# Altium PCB XXXX.687252.XXX.PcbDoc (part 1 of 2)
Units mm, origin at the board's own origin, x right, y up, seen from the top; angles counter-clockwise.
Board outline 100 x 45 mm, 4 copper layers (Top Layer, GND Layer, Power Layer, Bottom Layer), stack 1.466 mm thick; 65 components, 66 nets, 294 pads, 231 vias.
Unrouted connection lines stored in the file: 84.
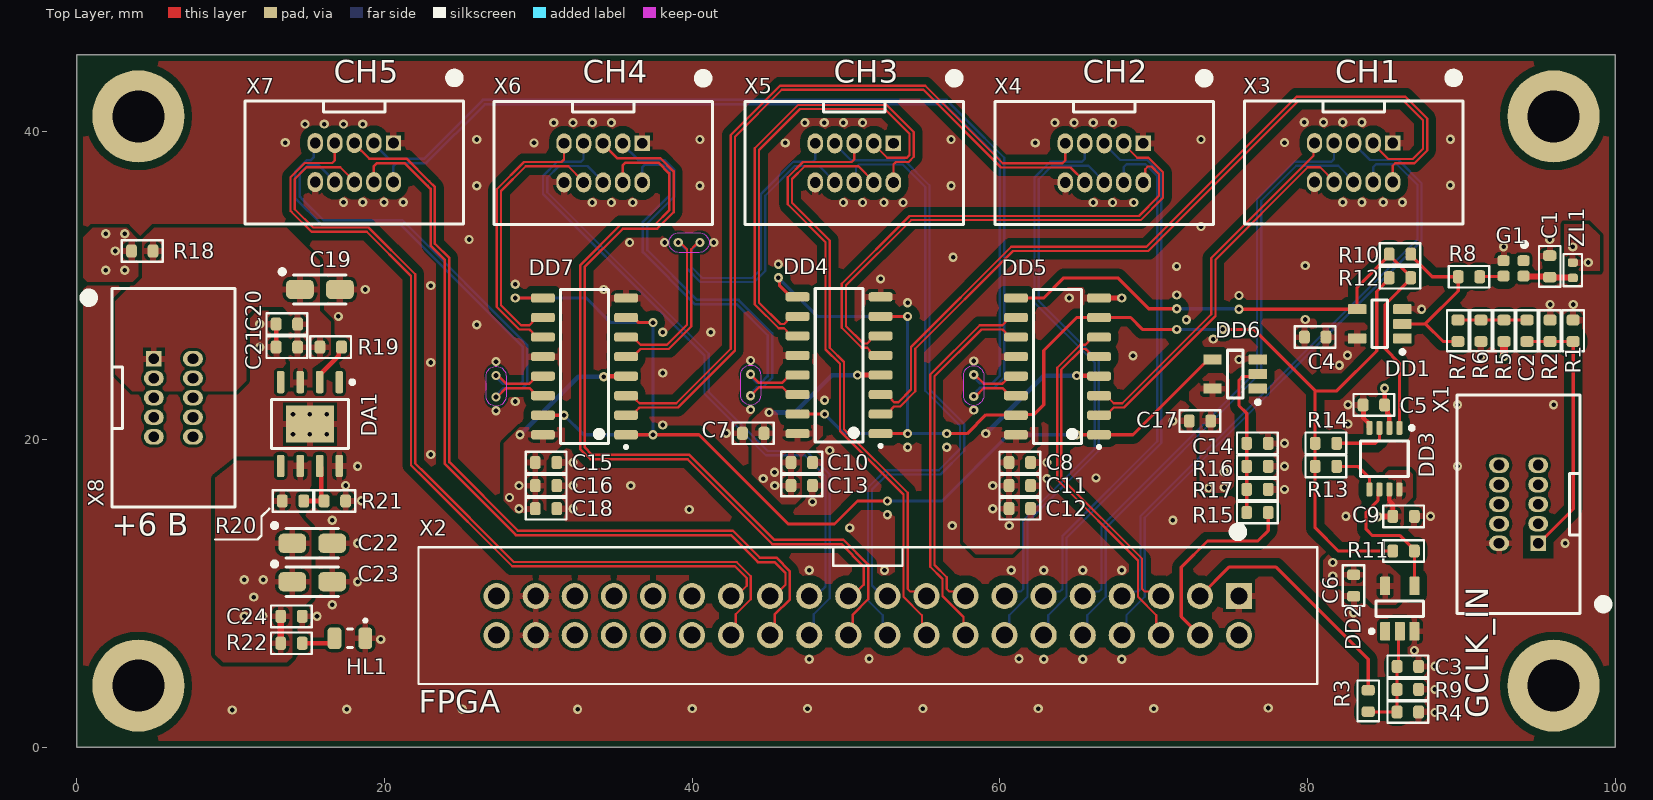
[diagram p0: Top Layer view]
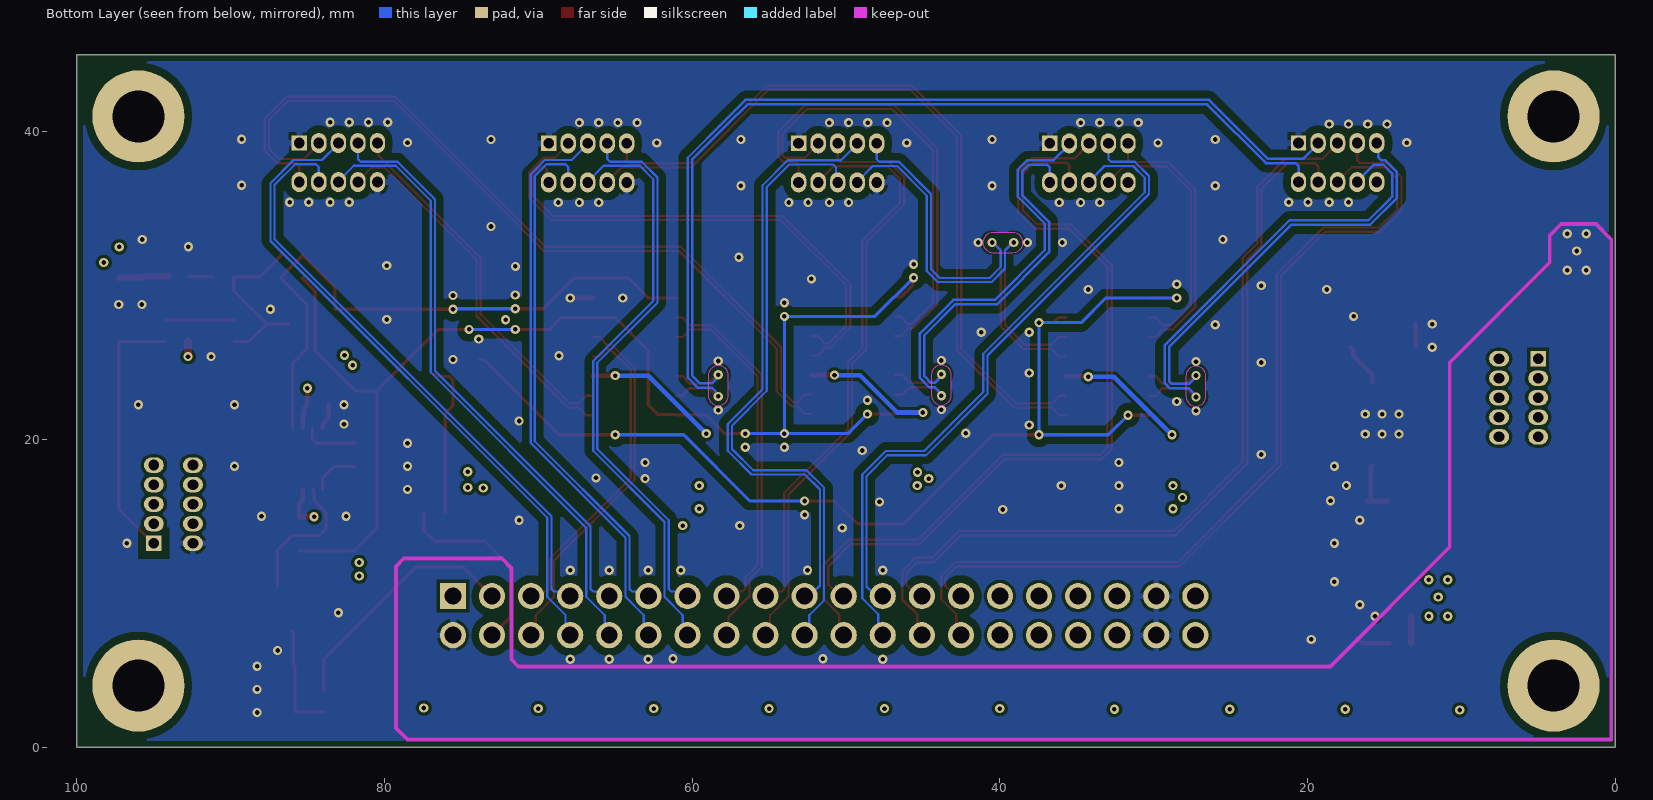
[diagram p1: Bottom Layer view, seen from below]
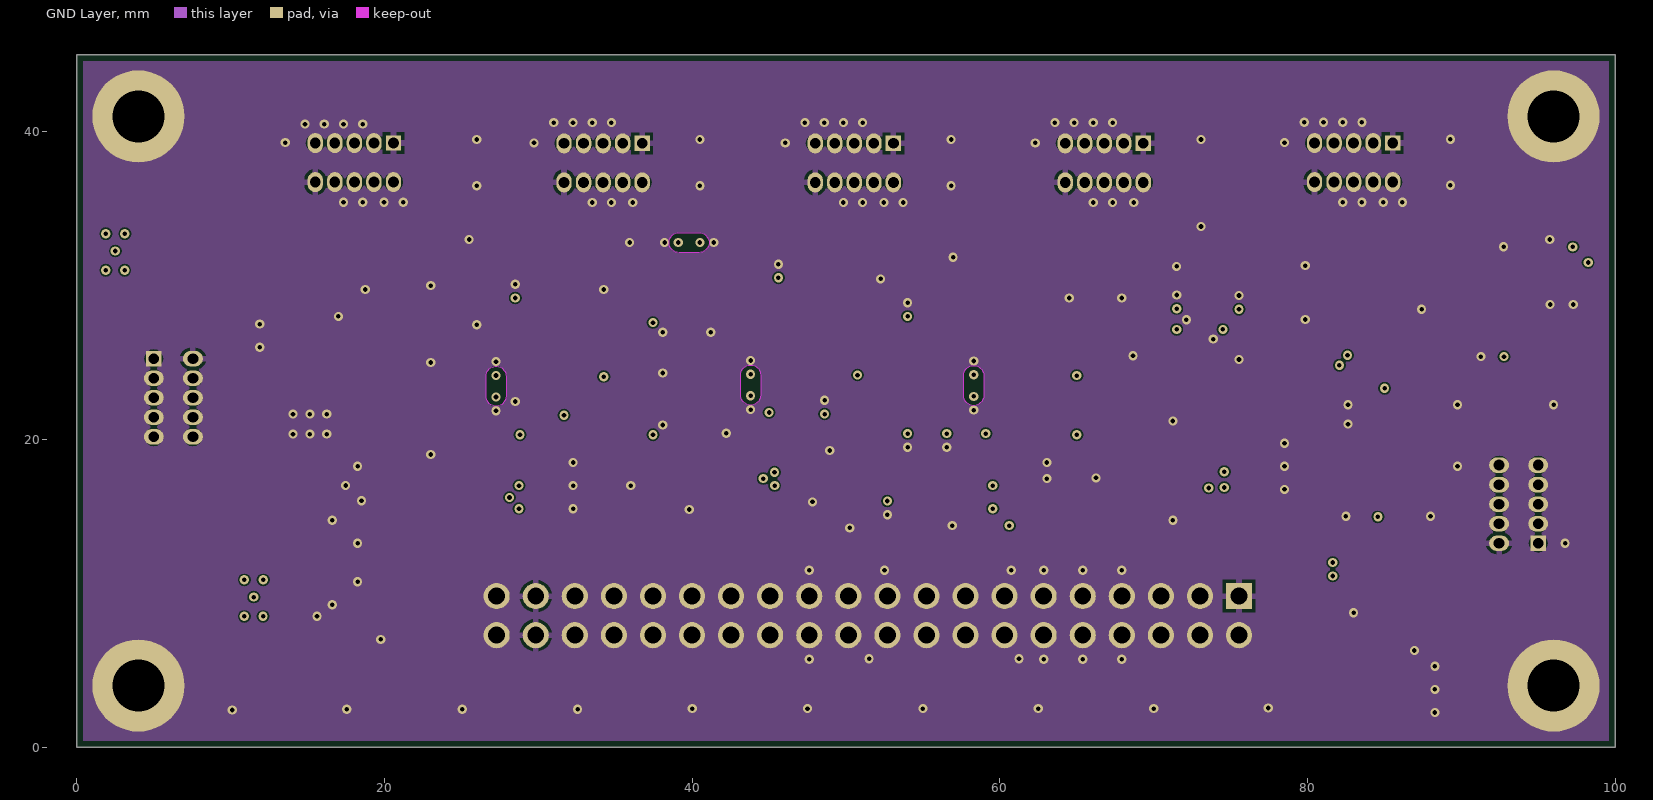
[diagram p2: GND Layer]
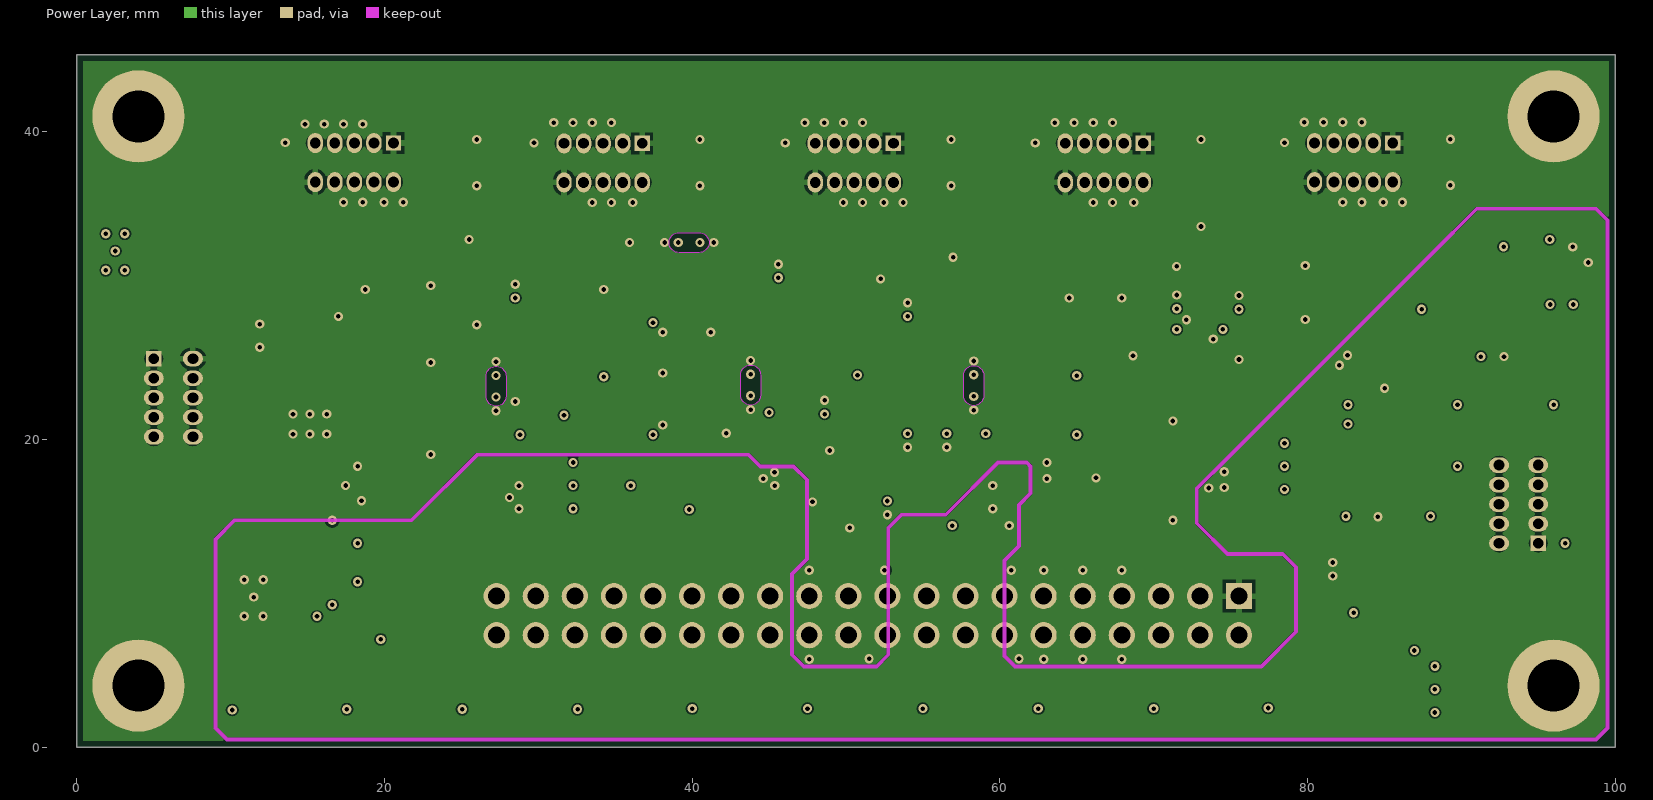
[diagram p3: Power Layer]
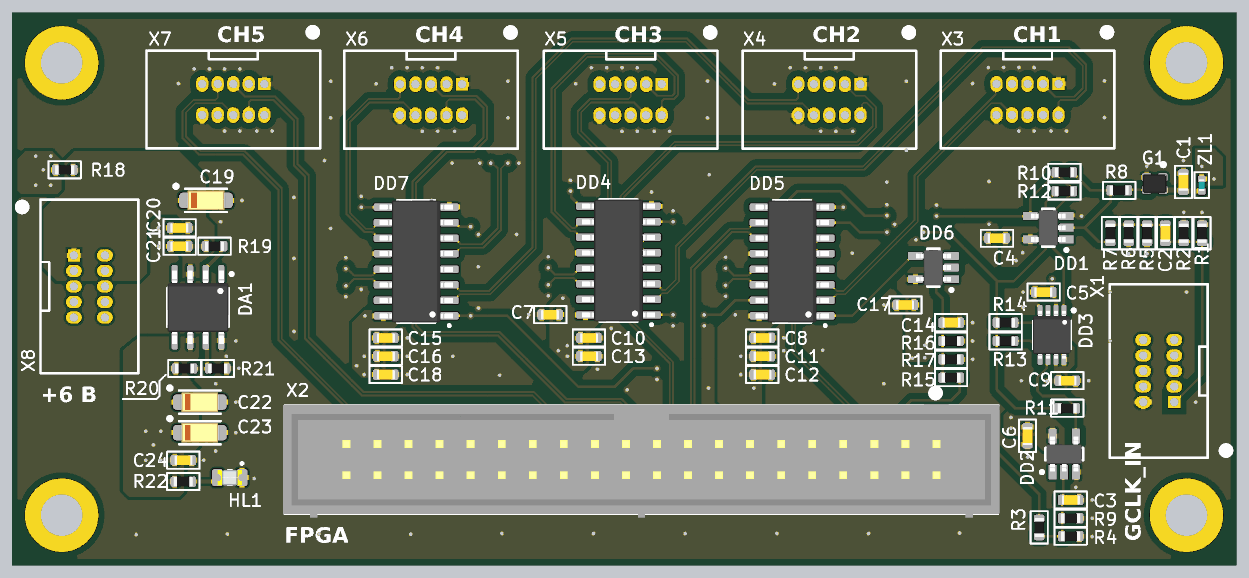
[diagram p5: 3D render of the assembled board from above, using the file's embedded part models]

## Layer stack, top to bottom
Top Solder: solder mask 0.01, Solder Resist, Dk 3.5
Top Layer: signal copper 0.018
Dielectric 1: prepreg 0.115, FR4 PR, Dk 4.2
GND Layer: signal copper 0.018
Dielectric1: core 1.164, FR4 Tg150, Dk 4.6
Power Layer: signal copper 0.018
Dielectric 2: prepreg 0.115, FR4 PR, Dk 4.2
Bottom Layer: signal copper 0.018
Bottom Solder: solder mask 0.01, Solder Resist, Dk 3.5

## Board outline
0,0 100,0 100,45 0,45

## Design rules (kind name [scope] priority, off if disabled: settings)
AcuteAngle [All] p1: minimum=3.50000000000000E+0001 checktracksonly=FALSE
AssemblyTestPointUsage [All] p1 off:
AssemblyTestpoint [All] p1 off: testpointundercomponent=TRUE minsize=1.016 maxsize=2.54 preferedsize=1.524 minholesize=0 maxholesize=1.016 preferedholesize=0.813 testpointgrid=0.025 usegrid=TRUE gridtolerance=0 allowsidetop=TRUE allowsidebottom=TRUE
BoardOutlineClearance "BoardOutlineClearance 2" [All] p1: gap=0.4 ignorepadtopadclearanceinfootprint=FALSE except(0: Arc-SplitContinuation Track-SplitContinuation SMDPad-SplitContinuation THPad-SplitContinuation Via-SplitContinuation Fill-SplitContinuation Poly-SplitContinuation Region-SplitContinuation Text-SplitContinuation) // V-Cut
Clearance KeepOut [IsKeepOut] p1: gap=0 ignorepadtopadclearanceinfootprint=FALSE
Clearance Clearance_Diff_and_Poly_GND [InAnyDifferentialPair or InNetClass('50OHM') vs (OnLayer('Top Layer') or OnLayer ('Bottom Layer'))  and InPolygon] p2: gap=0.5 ignorepadtopadclearanceinfootprint=FALSE // Standart
Clearance Clearance_mount_hole [(ObjectKind = 'Pad') And (Net = 'No Net') And (AsMM(HoleDiameter) = 3.4)] p3: gap=0.5 ignorepadtopadclearanceinfootprint=FALSE // Standart
Clearance "Clearance-1 1/2 Oz" [All] p4: gap=0.125 ignorepadtopadclearanceinfootprint=FALSE except(0.2: Arc-Fill Arc-Poly Track-Fill Track-Poly SMDPad-SMDPad SMDPad-Fill SMDPad-Poly THPad-Fill THPad-Poly Via-Fill Via-Poly Fill-Fill Fill-Poly Poly-Region Poly-Text; 0.25: Arc-Hole Track-Hole SMDPad-Hole THPad-Hole Via-Hole Fill-Hole Poly-Poly Poly-Hole Region-Hole Text-Hole) // Standart
DiffPairsRouting DiffPairsRouting-100Ohm [InDifferentialPairClass('All Differential Pairs')] p1: maxlimit=0.254 minlimit=0.127 mostfreqgap=0.254 toplayer_maxgap=0.127 toplayer_prefgap=0.127 toplayer_minwidth=0.145 toplayer_maxwidth=0.162 toplayer_prefwidth=0.146 bottomlayer_maxgap=0.127 bottomlayer_prefgap=0.127 bottomlayer_minwidth=0.145 bottomlayer_maxwidth=0.162 bottomlayer_prefwidth=0.146 impedanceprofiledriven=TRUE impedanceprofileid={437DA772-4E54-4FF0-86A0-BD5964D9EE25} impedanceprofilevalue=100.000000 maxuncoupledlength=12.7
FabricationTestPointUsage [All] p1 off: valid=0 allowmultiple=FALSE
FabricationTestpoint [All] p1 off: side=3 testpointundercomponent=TRUE minsize=1.016 maxsize=2.54 preferedsize=1.524 minholesize=0 maxholesize=1.016 preferedholesize=0.813 testpointgrid=0.025 allowsidetop=TRUE allowsidebottom=TRUE usegrid=TRUE gridtolerance=0
HoleSize "Minimum HoleSize" [IsPad] p1: absolutevalues=TRUE maxlimit=5.9 minlimit=0.6 maxpercent=80.000 minpercent=20.000
HoleSize "Minimum HoleSize VIA 1" [IsVia] p2: absolutevalues=TRUE maxlimit=5.9 minlimit=0.3 maxpercent=80.000 minpercent=20.000 // Standart
HoleToHoleClearance Hole2HoleClearance [All] p1: gap=0.25 allowstackedmicrovias=FALSE
MatchedLengths [InDifferentialPairClass('All Differential Pairs')] p1: tolerance=3.7 checknetsindiffpair=TRUE checkdiffpairvsdiffpair=FALSE checkxsignals=FALSE checkothers=FALSE
MinimumAnnularRing "Minimum AR VIA Standart" [IsVia] p1: minimumring=0.15
MinimumAnnularRing "Minimum AR PAD Standart" [IsPAD] p2: minimumring=0.15
MinimumSolderMaskSliver "SolderMask Bridge Standart" [All] p1: minsoldermaskwidth=0.15 // All Masks
PlaneClearance "PlaneClearance-1 1/2 Oz" [All] p1: clearance=0.2 // Standart
PlaneConnect "TermalConnect-1 1/2 Oz_pwr" [InNetClass('PWR')] p1: planeconnectstyle=Relief reliefexpansion=0.2 reliefentries=4 reliefconductorwidth=0.4 reliefairgap=0.2 // Standart
PlaneConnect "TermalConnect-1 1/2 Oz_1" [All] p2: planeconnectstyle=Relief reliefexpansion=0.2 reliefentries=4 reliefconductorwidth=0.2 reliefairgap=0.2 // Standart
PolygonConnect "PolygonConnect-1 1/2 Oz_PWR" [All] p1: thpad.connectstyle=Relief thpad.reliefconductorwidth=0.4 thpad.reliefentries=4 thpad.polygonreliefangle="90 Angle" thpad.airgapwidth=0.2 smdpad.connectstyle=Relief smdpad.reliefconductorwidth=0.4 smdpad.reliefentries=4 smdpad.polygonreliefangle="90 Angle" smdpad.airgapwidth=0.2 via.connectstyle=Direct via.reliefconductorwidth=0.254 via.reliefentries=4 via.polygonreliefangle="90 Angle" via.airgapwidth=0.254 // Standart
PolygonConnect "PolygonConnect-1 1/2 Oz" [All] p2: thpad.connectstyle=Relief thpad.reliefconductorwidth=0.2 thpad.reliefentries=4 thpad.polygonreliefangle="90 Angle" thpad.airgapwidth=0.2 smdpad.connectstyle=Relief smdpad.reliefconductorwidth=0.2 smdpad.reliefentries=4 smdpad.polygonreliefangle="90 Angle" smdpad.airgapwidth=0.2 via.connectstyle=Direct via.reliefconductorwidth=0.254 via.reliefentries=4 via.polygonreliefangle="90 Angle" via.airgapwidth=0.254 // Standart
RoutingCorners [All] p1 off: cornerstyle=45-Degree minsetback=2.54 maxsetback=2.54
RoutingVias [All] p1: holewidth=0.3 width=0.6 viastyle="Through Hole" minholewidth=0.2 minwidth=0.4 maxholewidth=5.9 maxwidth=6.4
SilkToSilkClearance Silk2SilkClearance [All] p1: silktosilkclearance=0.15
SilkToSolderMaskClearance Silk2SolderMaskClearance [IsPad] p1: minsilkscreentomaskgap=0.15 clearancetoexposedcopper=TRUE
SolderMaskExpansion SolderMaskExpansion-Via [IsVia] p1: expansion=0.05 istentingtop=TRUE // Standart
SolderMaskExpansion SolderMaskExpansion-1 [All] p2: expansion=0.05 istentingtop=FALSE // Standart
UnRoutedNet [All] p1: checkbadconnections=TRUE
ViasUnderSMD [All] p1: allowed=FALSE
Width "Width 1/2 Oz_Pwr" [InNetClass('PWR')] p1: maxlimit=10 minlimit=0.2 preferedwidth=0.4 midlayer1_prefwidth=0.2 midlayer2_prefwidth=0.2 minimp=50.000000 maximp=50.000000 favimp=50.000000 checkconnectedcopper=TRUE
Width Width_50Ohm [InNetClass('50OHM')] p2: maxlimit=0.254 minlimit=0.206 preferedwidth=0.254 toplayer_maxwidth=0.206 toplayer_prefwidth=0.206 bottomlayer_maxwidth=0.206 bottomlayer_prefwidth=0.206 impedanceprofiledriven=TRUE impedanceprofileid={D824DA4B-17E9-464F-A4D5-9A9BAC95BE66} impedanceprofilevalue=50.000000 minimp=50.000000 maximp=50.000000 favimp=50.000000
Width "Width 1/2 Oz" [All] p3: maxlimit=10 minlimit=0.125 preferedwidth=0.2 minimp=50.000000 maximp=50.000000 favimp=50.000000 checkconnectedcopper=TRUE
16 further rules are at their usual default settings.

## Classes and differential pairs
net class PWR: +3,3VDD +5VDD NetC19_1
net class DIFF_100OHM: CLK_N CLK_P CNV_1_N CNV_1_P CNV_2_N CNV_2_P CNV_3_N CNV_3_P CNV_4_N CNV_4_P CNV_5_N CNV_5_P CNV_DD_N CNV_DD_P SCK1_N SCK1_P SCK2_N SCK2_P SCK3_N SCK3_P SCK4_N SCK4_P SCK5_N SCK5_P SDA_11_N SDA_11_P SDA_12_N SDA_12_P SDA_21_N SDA_21_P SDA_22_N SDA_22_P SDA_31_N SDA_31_P SDA_32_N SDA_32_P SDA_41_N SDA_41_P SDA_42_N SDA_42_P SDA_51_N SDA_51_P SDA_52_N SDA_52_P
net class 50OHM: NetC2_1 NetC2_2 NetC3_1 NetC14_1 NetDD1_2 NetDD1_4 NetDD2_4 NetDD3_3 NetDD3_5 NetDD4_1 NetDD5_1 NetG1_3 NetR3_1 SCK_IN
component class xxxxxx.001_sh3_RTC: C19 C20 C21 C22 C23 C24 DA1 HL1 R18 R19 R20 R21 R22 X8 XS9
component class xxxxxx.001_sh2_RTC: C14 C15 C16 C17 C18 DD5 DD6 DD7 R15 R16 R17 X3 X4 X5 X6 X7
component class xxxxxx.001_sh1_RTC: C1 C2 C3 C4 C5 C6 C7 C8 C9 C10 C11 C12 C13 DD1 DD2 DD3 DD4 G1 R1 R2 R3 R4 R5 R6 R7 R8 R9 R10 R11 R12 R13 R14 X1 X2 ZL1
differential pair SDA_52: +SDA_52_P -SDA_52_N
differential pair SDA_51: +SDA_51_P -SDA_51_N
differential pair SDA_42: +SDA_42_P -SDA_42_N
differential pair SDA_41: +SDA_41_P -SDA_41_N
differential pair SDA_32: +SDA_32_P -SDA_32_N
differential pair SDA_31: +SDA_31_P -SDA_31_N
differential pair SDA_22: +SDA_22_P -SDA_22_N
differential pair SDA_21: +SDA_21_P -SDA_21_N
differential pair SDA_12: +SDA_12_P -SDA_12_N
differential pair SDA_11: +SDA_11_P -SDA_11_N
differential pair SCK5: +SCK5_P -SCK5_N
differential pair SCK4: +SCK4_P -SCK4_N
differential pair SCK3: +SCK3_P -SCK3_N
differential pair SCK2: +SCK2_P -SCK2_N
differential pair SCK1: +SCK1_P -SCK1_N
differential pair CNV_DD: +CNV_DD_P -CNV_DD_N
differential pair CNV_5: +CNV_5_P -CNV_5_N
differential pair CNV_4: +CNV_4_P -CNV_4_N
differential pair CNV_3: +CNV_3_P -CNV_3_N
differential pair CNV_2: +CNV_2_P -CNV_2_N
differential pair CNV_1: +CNV_1_P -CNV_1_N
differential pair CLK: +CLK_P -CLK_N

## Components (designator, comment, footprint, x,y, rotation, side; value= is the part's Value field where it differs from the comment)
C1 "100 нФ" CAPC160X080X080N 95.75,31.25 r90 top
C2 "100 нФ" CAPC160X080X080N 94.275,27.065 r90 top
C3 "10 пФ" CAPC160X080X080N 86.525,5.25 r0 top
C4 "100 нФ" CAPC160X080X080N 80.5,26.654 r180 top
C5 "100 нФ" CAPC160X080X080N 84.315,22.25 r180 top
C6 "100 нФ" CAPC160X080X080N 83,10.5 r270 top
C7 "1 нФ" CAPC160X080X080N 43.968,20.4 r180 top
C8 "1 нФ" CAPC160X080X080N 61.3,18.5 r0 top
C9 "100 нФ" CAPC160X080X080N 86.25,15 r0 top
C10 "10 нФ" CAPC160X080X080N 47.122,18.5 r0 top
C11 "10 нФ" CAPC160X080X080N 61.3,17 r0 top
C12 "100 нФ" CAPC160X080X080N 61.3,15.5 r0 top
C13 "100 нФ" CAPC160X080X080N 47.122,17 r0 top
C14 "10 пФ" CAPC160X080X080N 76.75,19.75 r0 top
C15 "1 нФ" CAPC160X080X080N 30.5,18.5 r0 top
C16 "10 нФ" CAPC160X080X080N 30.5,17 r0 top
C17 "100 нФ" CAPC160X080X080N 73.01,21.2 r180 top
C18 "100 нФ" CAPC160X080X080N 30.5,15.5 r0 top
C19 "4.7 мкФ" CAPMP3216X180N 15.8,29.75 r0 top
C20 "100 нФ" CAPC160X080X080N 13.65,27.5 r180 top
C21 "100 нФ" CAPC160X080X080N 13.65,26 r180 top
C22 "10 мкФ" CAPMP3216X180N 15.3,13.25 r0 top
C23 "4.7 мкФ" CAPMP3216X180N 15.3,10.75 r0 top
C24 "100 нФ" CAPC160X080X080N 13.95,8.5 r0 top
DA1 "TPS7A7002DDAR" SOIC127P600X170_HS-9N 15.15,21 r270 top
DD1 "SN74AUP1G14DBVR" TI_DBV0005A_SOT23_5 84.7,27.515 r180 top
DD2 "SN74AUP1G14DBVR" TI_DBV0005A_SOT23_5 86,9 r90 top
DD3 "74LVC1G74DP" TSOP65P400X110-8N 85,18.75 r270 top
DD4 "DS90LV031ATM/NOPB" SOIC127P600X175-16N 49.55,24.825 r180 top
DD5 "DS90LV031ATM/NOPB" SOIC127P600X175-16N 63.75,24.75 r180 top
DD6 "SN74AUP1G14DBVR" TI_DBV0005A_SOT23_5 75.3,24.25 r180 top
DD7 "DS90LV031ATM/NOPB" SOIC127P600X175-16N 33,24.75 r180 top
G1 "ECS-TXO-2016-33-250" OSCCC160X200X80-4N 93.4,31.125 r270 top
HL1 "L-C170KGCT" LEDC200X125X075N_RED 17.75,7.075 r0 top
R1 "100 Ом" RESC160X080X045N 97.275,27.065 r90 top
R2 "100 Ом" RESC160X080X045N 95.775,27.065 r90 top
R3 "10 Ом" RESC160X080X045N 83.95,3 r270 top
R4 "100 Ом" RESC160X080X045N 86.525,2.28 r0 top
R5 "1 кОм" RESC160X080X045N 92.775,27.065 r90 top
R6 "1 кОм" RESC160X080X045N 91.275,27.065 r270 top
R7 "Не уст." RESC160X080X045N 89.775,27.065 r270 top
R8 "0 Ом" RESC160X080X045N 90.5,30.575 r180 top
R9 "100 Ом" RESC160X080X045N 86.525,3.75 r0 top
R10 "Не уст." RESC160X080X045N 86.015,32.05 r180 top
R11 "Не уст." RESC160X080X045N 86.25,12.75 r180 top
R12 "Не уст." RESC160X080X045N 86.015,30.51 r180 top
R13 "Не уст." RESC160X080X045N 81.2,18.25 r180 top
R14 "0 Ом" RESC160X080X045N 81.2,19.75 r180 top
R15 "10 Ом" RESC160X080X045N 76.75,15.25 r180 top
R16 "100 Ом" RESC160X080X045N 76.75,18.25 r0 top
R17 "100 Ом" RESC160X080X045N 76.75,16.75 r0 top
R18 "0 Ом" RESC160X080X045N 4.25,32.25 r0 top
R19 "10 кОм" RESC160X080X045N 16.5,26 r0 top
R20 "150 кОм" RESC160X080X045N 14.05,16 r0 top
R21 "27 кОм" RESC160X080X045N 16.77,16 r0 top
R22 "180 Ом" RESC160X080X045N 13.95,6.75 r0 top
X1 "DS1064-16-10V8BA-3A" BHTH127x254_2X5 93.73,15.79 r90 top
X2 "DS1013-40SSIB1-B-0" BHTH254_2X20 51.42,8.545 r180 top
X3 "DS1064-16-10V8BA-3A" BHTH127x254_2X5 83,38 r180 top
X4 "DS1064-16-10V8BA-3A" BHTH127x254_2X5 66.79,37.98 r180 top
X5 "DS1064-16-10V8BA-3A" BHTH127x254_2X5 50.54,37.98 r180 top
X6 "DS1064-16-10V8BA-3A" BHTH127x254_2X5 34.21,37.98 r180 top
X7 "DS1064-16-10V8BA-3A" BHTH127x254_2X5 18.04,38 r180 top
X8 "DS1064-16-10V8BA-3A" BHTH127x254_2X5 6.27,22.71 r270 top
ZL1 "1 кОм" INDC100X050X050N 97.25,31 r270 top

## Footprints (in the part's own frame and the unit in brackets; to place one, negate y for a bottom-side part, rotate by r counter-clockwise, add the part's x,y. Pads: shape width x height; smd on the part's side, far side on the other; paste and mask are expansions set on the pad)
BHTH127x254_2X5 [mm]
  rect 1x1 hole 0.7 mask+0.05: 1(-2.54,-1.27)
  oval 1x1.3 hole 0.7 mask+0.05: 2(-2.54,1.27) 3(-1.27,-1.27) 4(-1.27,1.27) 5(0,-1.27) 6(0,1.27) 7(1.27,-1.27) 8(1.27,1.27) 9(2.54,-1.27) 10(2.54,1.27)
  silkscreen extent -7.1,-5.8 7.1,4, body extent -7.1,-4 7.1,4, height 5.75
BHTH254_2X20 [mm]
  rect 1.7x1.7 hole 1.1 mask+0.1: 1(-24.13,-1.27)
  round 1.7 hole 1.1 mask+0.1: 2(-24.13,1.27) 3(-21.59,-1.27) 4(-21.59,1.27) 5(-19.05,-1.27) 6(-19.05,1.27) 7(-16.51,-1.27) 8(-16.51,1.27) 9(-13.97,-1.27) 10(-13.97,1.27) 11(-11.43,-1.27) 12(-11.43,1.27) 13(-8.89,-1.27) 14(-8.89,1.27) 15(-6.35,-1.27) 16(-6.35,1.27) 17(-3.81,-1.27) 18(-3.81,1.27) 19(-1.27,-1.27) 20(-1.27,1.27) 21(1.27,-1.27) 22(1.27,1.27) 23(3.81,-1.27) 24(3.81,1.27) 25(6.35,-1.27) 26(6.35,1.27) 27(8.89,-1.27) 28(8.89,1.27) 29(11.43,-1.27) 30(11.43,1.27) 31(13.97,-1.27) 32(13.97,1.27) 33(16.51,-1.27) 34(16.51,1.27) 35(19.05,-1.27) 36(19.05,1.27) 37(21.59,-1.27) 38(21.59,1.27) 39(24.13,-1.27) 40(24.13,1.27)
  silkscreen extent -29.21,-5.74 29.21,4.45, body extent -29.3,-4.55 29.3,4.75, height 9.1
CAPC160X080X080N [mm]
  rrect50% 0.7x0.85 smd: 1(-0.7,0) 2(0.7,0)
  silkscreen extent -1.33,-0.7 1.33,0.7, body extent -0.72,-0.4 0.78,0.4, height 0.65
CAPMP3216X180N [mm]
  rrect50% 1.8x1.25 smd mask+0.1: 1(-1.3,0) 2(1.3,0)
  silkscreen extent -2.6,-0.95 1.7,1.3, body extent -1.6,-0.8 1.6,0.8, height 1.8
INDC100X050X050N [mm]
  rrect50% 0.55x0.65 smd mask+0.1: 1(-0.5,0) 2(0.5,0)
  silkscreen extent -1.05,-0.6 1.05,0.6, body extent -0.5,-0.25 0.5,0.25, height 0.6
LEDC200X125X075N_RED [mm]
  rrect50% 0.9x1.4 smd mask+0.1: 1(-1,0) 2(1,0)
  silkscreen extent -0.15,-0.6 1.1,1.25, body extent -1,-0.62 1,0.63, height 0.75
OSCCC160X200X80-4N [mm]
  rrect50% 0.7x0.8 smd: 1(-0.5,0.65) 2(-0.5,-0.65) 3(0.5,-0.65) 4(0.5,0.65)
  silkscreen extent -1.7,0.55 -1.4,0.85, body extent -0.8,-1 0.8,1, height 0.65
RESC160X080X045N [mm]
  rrect50% 0.7x0.85 smd: 1(-0.7,0) 2(0.7,0)
  silkscreen extent -1.33,-0.7 1.33,0.7, body extent -0.8,-0.4 0.8,0.4, height 0.38
SOIC127P600X170_HS-9N [mm]
  rrect50% 1.45x0.5 smd: 1(-2.725,1.905) 2(-2.725,0.635) 3(-2.725,-0.635) 4(-2.725,-1.905) 5(2.725,-1.905) 6(2.725,-0.635) 7(2.725,0.635) 8(2.725,1.905)
  rect 2.4x3.1 smd: 9(0,0)
  silkscreen extent -2.85,-2.5 1.6,2.88, body extent -3,-2.5 3,2.5, height 1.7
SOIC127P600X175-16N [mm]
  rrect50% 1.55x0.6 smd mask+0.1: 1(-2.7,4.445) 2(-2.7,3.175) 3(-2.7,1.905) 4(-2.7,0.635) 5(-2.7,-0.635) 6(-2.7,-1.905) 7(-2.7,-3.175) 8(-2.7,-4.445) 9(2.7,-4.445) 10(2.7,-3.175) 11(2.7,-1.905) 12(2.7,-0.635) 13(2.7,0.635) 14(2.7,1.905) 15(2.7,3.175) 16(2.7,4.445)
  silkscreen extent -2.8,-5 1.55,5.34, body extent -3,-5 3,5, height 1.75
TI_DBV0005A_SOT23_5 [mm] "SOT23, 5-Leads, Body 3.05x1.75mm, Pitch 0.95mm, IPC Low Density"
  rrect15% 1.2x0.65 smd mask+0.05: 1(-1.475,0.95) 2(-1.475,0) 3(-1.475,-0.95) 4(1.475,-0.95) 5(1.475,0.95)
  silkscreen extent -1.6,-1.55 0.5,1.95, body extent -1.42,-1.46 1.42,1.46, height 1.08
TSOP65P400X110-8N [mm]
  rrect50% 0.9x0.4 smd mask+0.05: 1(-2,0.975) 2(-2,0.325) 3(-2,-0.325) 4(-2,-0.975) 5(2,-0.975) 6(2,-0.325) 7(2,0.325) 8(2,0.975)
  silkscreen extent -2.12,-1.55 1.15,1.9, body extent -1.99,-1.55 1.99,1.55, height 1.1

## Part data
C1 C2 C4 C5 C6 C9 C12 C13 C17 C18 C20 C21 C24: library part 16734, "Chip Monolithic Ceramic Capacitor", Manufacturer=Murata, ManufacturerPartNumber=GRM188R71E104KA01D, Package=0603, Tolerance=±10%, ValueBOM="Chip Monolithic Ceramic Capacitor, 0603, X7R, 25V, ±10%, 100n", Voltage="25 В", Ceramic Type=X7R, ComponentLink1Description=Datasheet, ComponentLink1URL=ftp://51.15.50.217/murata/capacitors/chip_monolithic_ceramic_cap.pdf, Number=16734, Part Number=GRM188R71E104KA01D, Series=GRM188, Type=Конденсатор, ValueSCH="100 нФ"
C3 C14: library part 274, "Multilayer Ceramic Chip Capacitor", Manufacturer=Yageo, ManufacturerPartNumber=CC0603GPNP09BN100, Package=0603, Tolerance=±2%, ValueBOM="Multilayer Ceramic Chip Capacitor, 0603, NP0, 50V, ±2%, 10p", Voltage="50 В", Ceramic Type=NP0, ComponentLink1Description=Datasheet, ComponentLink1URL=ftp://51.15.50.217/yageo/capasitors/CC_series_(NP0).pdf#, HelpURL=http://www.yageo.com/e, Modify Date=25.03.2009, Number=274, Part Number=CC0603GPNP09BN100, Series=CC0603, Type=Конденсатор, ValueSCH="10 пФ"
C7 C8 C15: library part 16711, "Chip Monolithic Ceramic Capacitor", Manufacturer=Murata, ManufacturerPartNumber=GRM188R71H102KA01D, Package=0603, Tolerance=±10%, ValueBOM="Chip Monolithic Ceramic Capacitor, 0603, X7R, 50V, ±10%, 1n", Voltage="50 В", Ceramic Type=X7R, ComponentLink1Description=Datasheet, ComponentLink1URL=ftp://51.15.50.217/murata/capacitors/chip_monolithic_ceramic_cap.pdf, Number=16711, Part Number=GRM188R71H102KA01D, Series=GRM188, Type=Конденсатор, ValueSCH="1 нФ"
C10 C11 C16: library part 16728, "Chip Monolithic Ceramic Capacitor", Manufacturer=Murata, ManufacturerPartNumber=GRM188R71E103KA01D, Package=0603, Tolerance=±10%, ValueBOM="Chip Monolithic Ceramic Capacitor, 0603, X7R, 25V, ±10%, 10n", Voltage="25 В", Ceramic Type=X7R, ComponentLink1Description=Datasheet, ComponentLink1URL=ftp://51.15.50.217/murata/capacitors/chip_monolithic_ceramic_cap.pdf, Number=16728, Part Number=GRM188R71E103KA01D, Series=GRM188, Type=Конденсатор, ValueSCH="10 нФ"
C19 C23: library part 16907, "Solid Tantalum Surface Mount Capacitor", Manufacturer=AVX, ManufacturerPartNumber=TAJA475M025RNJ, Package="CAP TNT A", Tolerance=±20%, ValueBOM="Solid Tantalum Surface Mount Capacitor, CAP TNT A, 4.7u x 25V", Voltage="25 В", Ceramic Type="4.7 мкФ", ComponentLink1Description=Datasheet, ComponentLink1URL=ftp://51.15.50.217/avx/capacitors/TAJ.PDF, HelpURL=http://www.avx.com/, Modify Date=20.02.2009, Number=16907, Part Number=TAJA475M025RNJ, Series=TAJ, Type=Конденсатор, ValueSCH="4.7 мкФ"
C22: library part 16905, "Solid Tantalum Surface Mount Capacitor", Manufacturer=AVX, ManufacturerPartNumber=TAJA106M016RNJ, Package="CAP TNT A", Tolerance=±20%, ValueBOM="Solid Tantalum Surface Mount Capacitor, CAP TNT A, 10u x 16V", Voltage="16 В", Ceramic Type="10 мкФ", ComponentLink1Description=Datasheet, ComponentLink1URL=ftp://51.15.50.217/avx/capacitors/TAJ.PDF, HelpURL=http://www.avx.com/, Modify Date=19.02.2009, Number=16905, Part Number=TAJA106M016RNJ, Series=TAJ, Type=Конденсатор, ValueSCH="10 мкФ"
DA1: library part 16901, "Very Low Input, Very Low Dropout 3-A Regulator With Enable", Manufacturer="Texas Instruments", ManufacturerPartNumber=TPS7A7002DDAR, Modify Date=21.06.2023, Number=16901, Part Number=TPS7A7002DDAR, Type="Микросхема аналоговая", ValueBOM="Very Low Input, Very Low Dropout 3-A Regulator With Enable", ValueSCH=TPS7A7002DDAR
DD1 DD2 DD6: library part 16900, "Low-Power Single Schmitt-Trigger Inverter", Manufacturer="Texas Instruments", Package=101, ManufacturerPartNumber=SN74AUP1G14DBVR, Modify Date=21.06.2023, Mount=1, Number=16900, Part Number=SN74AUP1G14DBVR, Type="Микросхема цифровая", ValueBOM="Low-Power Single Schmitt-Trigger Inverter", ValueSCH=SN74AUP1G14DBVR
DD3: library part 16899, "Single D-type flip-flop with set and reset", Manufacturer=Nexperia, Package=135, ManufacturerPartNumber=74LVC1G74DP, Modify Date=21.06.2023, Mount=1, Number=16899, Part Number=74LVC1G74DP, Type="Микросхема цифровая", ValueBOM="Single D-type flip-flop with set and reset", ValueSCH=74LVC1G74DP
DD4 DD5 DD7: library part 16898, "3-V LVDS Quad CMOS Differential Line Driver", Manufacturer="Texas Instruments", ManufacturerPartNumber=DS90LV031ATM/NOPB, Modify Date=21.06.2023, Number=16898, Part Number=DS90LV031ATM/NOPB, Type="Микросхема цифровая", ValueBOM="3-V LVDS Quad CMOS Differential Line Driver", ValueSCH=DS90LV031ATM/NOPB
G1: library part 16902, "SMD CMOS TCXO, 25 МГц, ±2.5ppm", Manufacturer="ECS INC INTERNATIONAL", Package=68, ValueSCH="25 МГц", ManufacturerPartNumber=ECS-TXO-2016-33-250, Modify Date=21.06.2023, Mount=1, Note1SCH="25 МГц", Note2SCH=±2.5ppm, Number=16902, Part Number=ECS-TXO-2016-33-250, Series=TXO-2016, Type=Генератор, ValueBOM="SMD CMOS TCXO, 25 МГц, ±2.5ppm"
HL1: library part 16903, "Светодиод поверхностного монтажа, зеленый, 0805", Color=Green, Current="30 мА", Manufacturer="Para Light", Package=0805, Intensity="30 мКд", ManufacturerPartNumber=L-C170KGCT, Modify Date=21.06.2023, Number=16903, Part Number=L-C170KGCT, Type=Светодиод, ValueBOM="Светодиод поверхностного монтажа, зеленый, 0805", ValueSCH=L-C170KGCT
R1 R2 R4 R9 R16 R17: library part 2702, "General Purpose Chip Resistor", Manufacturer=Yageo, ManufacturerPartNumber=RC0603FR-13100R, Package=0603, Power="100 мВт", Tolerance=±1%, ValueBOM="General Purpose Chip Resistor, 0603, ±1%, 100R", ComponentLink1Description=Datasheet, ComponentLink1URL=ftp://51.15.50.217/yageo/resistors/RC0603_series.pdf#, HelpURL=http://www.yageo.com/e, Modify Date=04.01.2009, Number=2702, Part Number=RC0603FR-13100R, Series=RC0603, Type=Резистор, ValueSCH="100 Ом"
R3 R15: library part 2588, "General Purpose Chip Resistor", Manufacturer=Yageo, ManufacturerPartNumber=RC0603FR-1310R, Package=0603, Power="100 мВт", Tolerance=±1%, ValueBOM="General Purpose Chip Resistor, 0603, ±1%, 10R", ComponentLink1Description=Datasheet, ComponentLink1URL=ftp://51.15.50.217/yageo/resistors/RC0603_series.pdf#, HelpURL=http://www.yageo.com/e, Modify Date=04.01.2009, Number=2588, Part Number=RC0603FR-1310R, Series=RC0603, Type=Резистор, ValueSCH="10 Ом"
R5 R6: library part 2816, "General Purpose Chip Resistor", Manufacturer=Yageo, ManufacturerPartNumber=RC0603FR-131K, Package=0603, Power="100 мВт", Tolerance=±1%, ValueBOM="General Purpose Chip Resistor, 0603, ±1%, 1K", ComponentLink1Description=Datasheet, ComponentLink1URL=ftp://51.15.50.217/yageo/resistors/RC0603_series.pdf#, HelpURL=http://www.yageo.com/e, Modify Date=04.01.2009, Number=2816, Part Number=RC0603FR-131K, Series=RC0603, Type=Резистор, ValueSCH="1 кОм"
R7 R10 R11 R12 R13: library part 2058, "General Purpose Chip Resistor", Manufacturer=Yageo, ManufacturerPartNumber=RC0603JR-130R, Package=0603, Power="100 мВт", Tolerance=±5%, ValueBOM="General Purpose Chip Resistor, 0603, ±5%, 0R", ValueSCH="0 Ом", ComponentLink1Description=Datasheet, ComponentLink1URL=ftp://51.15.50.217/yageo/resistors/RC0603_series.pdf#, HelpURL=http://www.yageo.com/e, Modify Date=04.01.2009, Note="Не уст.", Number=2058, Part Number=RC0603JR-130R, Series=RC0603, Type=Резистор
R8 R14 R18: library part 2058, "General Purpose Chip Resistor", Manufacturer=Yageo, ManufacturerPartNumber=RC0603JR-130R, Package=0603, Power="100 мВт", Tolerance=±5%, ValueBOM="General Purpose Chip Resistor, 0603, ±5%, 0R", ComponentLink1Description=Datasheet, ComponentLink1URL=ftp://51.15.50.217/yageo/resistors/RC0603_series.pdf#, HelpURL=http://www.yageo.com/e, Modify Date=04.01.2009, Number=2058, Part Number=RC0603JR-130R, Series=RC0603, Type=Резистор, ValueSCH="0 Ом"
R19: library part 2930, "General Purpose Chip Resistor", Manufacturer=Yageo, ManufacturerPartNumber=RC0603FR-1310K, Package=0603, Power="100 мВт", Tolerance=±1%, ValueBOM="General Purpose Chip Resistor, 0603, ±1%, 10K", ComponentLink1Description=Datasheet, ComponentLink1URL=ftp://51.15.50.217/yageo/resistors/RC0603_series.pdf#, HelpURL=http://www.yageo.com/e, Modify Date=04.01.2009, Number=2930, Part Number=RC0603FR-1310K, Series=RC0603, Type=Резистор, ValueSCH="10 кОм"
R20: library part 3062, "General Purpose Chip Resistor", Manufacturer=Yageo, ManufacturerPartNumber=RC0603FR-13150K, Package=0603, Power="100 мВт", Tolerance=±1%, ValueBOM="General Purpose Chip Resistor, 0603, ±1%, 150K", ComponentLink1Description=Datasheet, ComponentLink1URL=ftp://51.15.50.217/yageo/resistors/RC0603_series.pdf#, HelpURL=http://www.yageo.com/e, Modify Date=04.01.2009, Number=3062, Part Number=RC0603FR-13150K, Series=RC0603, Type=Резистор, ValueSCH="150 кОм"
R21: library part 2977, "General Purpose Chip Resistor", Manufacturer=Yageo, ManufacturerPartNumber=RC0603FR-1327K, Package=0603, Power="100 мВт", Tolerance=±1%, ValueBOM="General Purpose Chip Resistor, 0603, ±1%, 27K", ComponentLink1Description=Datasheet, ComponentLink1URL=ftp://51.15.50.217/yageo/resistors/RC0603_series.pdf#, HelpURL=http://www.yageo.com/e, Modify Date=04.01.2009, Number=2977, Part Number=RC0603FR-1327K, Series=RC0603, Type=Резистор, ValueSCH="27 кОм"
R22: library part 2729, "General Purpose Chip Resistor", Manufacturer=Yageo, ManufacturerPartNumber=RC0603FR-13180R, Package=0603, Power="100 мВт", Tolerance=±1%, ValueBOM="General Purpose Chip Resistor, 0603, ±1%, 180R", ComponentLink1Description=Datasheet, ComponentLink1URL=ftp://51.15.50.217/yageo/resistors/RC0603_series.pdf#, HelpURL=http://www.yageo.com/e, Modify Date=04.01.2009, Number=2729, Part Number=RC0603FR-13180R, Series=RC0603, Type=Резистор, ValueSCH="180 Ом"
X1 X3 X4 X5 X6 X7 X8: library part 16896, "1.27mm Box Header V/T Type H=7.1mm, 10 pin", Manufacturer=Connfly, ValueBOM="1.27mm Box Header V/T Type H=7.1mm, 10 pin", ManufacturerPartNumber=DS1064-16-10V8BA-3A, Modify Date=21.06.2023, Number=16896, Part Number=DS1064-16-10V8BA-3A, Type=Разъем, ValueSCH=DS1064-16-10V8BA-3A
  X1 X8: Series=DS1023-40
  X3 X4 X5 X6 X7: Series=DS1064-16
X2: library part 16897, "2.54mm Box Header, Two Rows, 40 pins", Manufacturer=Connfly, ValueBOM="2.54mm Box Header, Dual Rows, 40 pins", ManufacturerPartNumber=DS1013-40SSIB1-B-0, Modify Date=21.06.2023, Number=16897, Part Number=DS1013-40SSIB1-B-0, Series=DS1013, Type=Разъем, ValueSCH=DS1013-40SSIB1-B-0
ZL1: library part 16895, "Chip Ferrite Bead", Current="300 мА", Manufacturer=Murata, ManufacturerPartNumber=BLM15AG102SN1D, Package=0402, Tolerance=±25%, ValueBOM="Chip Ferrite Bead, 0402, 300мА, ±25%, 0.65 Ом @ 100 MHz", HelpURL=http://www.murata.com/, Modify Date=20.06.2023, Number=16895, Part Number=BLM15AG102SN1D, Series=BLM15AG, Type=Индуктивность, ValueSCH="1 кОм"

## Free pads (board coordinates)
  round 6 hole 3.4: 2(4,4) 2(4,41) 2(96,4) 2(96,41)

## Via types
v1: diameter 0.6, hole 0.3, Top Layer to Bottom Layer, tented both sides, 225 vias
v2: diameter 0.6, hole 0.3, Top Layer to Bottom Layer, 6 vias

## Nets (pads, with @x,y where several pads share a name; then routed paths per layer and width w, separated by ;. In a path a pad name is that pad's centre, name@x,y a point inside that pad or via, vN(x,y) a via of type N, cw(c..) or ccw(c..) an arc to the next point about the centre after c; other vN are vias at no path point)
+3,3VDD: C4.1 C5.1 C6.1 C7.1 C8.1 C9.1 C10.1 C11.1 C12.1 C13.1 C15.1 C16.1 C17.1 C18.1 C22.1 C23.1 C24.1 DA1.6 DD1.5 DD2.5 DD3.2 DD3.7 DD3.8 DD4.4 DD4.16 DD5.4 DD5.16 DD6.5 DD7.4 DD7.16 R5.1 R20.1 R22.1 ZL1.1 | length 33.8
  Top Layer w0.3: v1(34.25,24.082) 34.267,24.098 35.683,24.098 DD7.4@35.7,24.115 ; v1(50.75,24.186) 50.752,24.188 52.248,24.188 DD4.4@52.25,24.19 ; v1(65,24.15) 65.018,24.132 66.432,24.132 DD5.4@66.45,24.115 ; v1(84.578,14.967) v1@84.594,14.984 ; v1(85.015,23.326) C5.1@85.015,22.25 85.2,22.065 85.2,21.7 85.325,21.575 DD3.2@85.325,20.75 ; DD3.7@85.325,16.75 85.325,16.007 85.542,15.79 85.542,15.008 C9.1@85.55,15 C9.1@85.534,14.984
  Top Layer w0.4: R22.1@13.25,6.75 C24.1@13.25,8.5 ; v1@84.594,14.984 C9.1@85.534,14.984
  Top Layer w0.5: v1@92.775,25.471 R5.1@92.775,26.365
  Bottom Layer w0.3: v1(28.81,20.305) 32.586,24.082 v1(34.25,24.082) ; v1(45,21.75) 46.657,21.75 49.093,24.186 v1(50.75,24.186) ; v1(59.091,20.38) 62.861,24.15 v1(65,24.15)
  other v1: 10.883,8.5 12.105,8.5 11.5,9.75 10.883,10.875 12.117,10.875 81.646,11.125 81.645,12 60.617,14.397 28.742,15.5 59.542,15.5 28.125,16.225 73.581,16.844 74.59,16.877 28.742,17 45.364,17 59.542,17 44.623,17.455 45.349,17.868 74.59,17.897 82.077,24.821 92.775,25.385 82.602,25.476 98.25,31.5 97.25,32.519
+5VDD: R18.1 X2.2
  other v1: 1.883,31 3.105,31 2.5,32.25 1.883,33.375 3.117,33.375
CLK_N: DD5.11 X2.15 | length 22.4
  Top Layer w0.146: X2.15@57.77,9.815 57.478,10.107 56.722,10.107 56.551,10.278 56.551,11.034 55.753,11.832 55.753,24.105 58.802,27.154 60.177,27.154 60.348,26.983 60.348,26.924 60.617,26.655 DD5.11@61.05,26.655
CLK_P: DD5.10 X2.16 | length 25
  Top Layer w0.146: X2.16@57.77,7.275 57.638,7.407 57.638,8.465 56.278,9.825 56.278,10.921 55.481,11.719 55.481,24.218 58.689,27.426 60.177,27.426 60.348,27.597 60.348,27.656 60.617,27.925 DD5.10@61.05,27.925
CNV_1_N: DD4.3 X3.2 | length 52
  Top Layer w0.146: DD4.3@52.25,22.92 52.683,22.92 52.952,22.651 52.952,22.592 53.123,22.421 53.406,22.421 54.227,23.242 54.227,26.015 60.743,32.531 69.543,32.531 79.293,42.281 86.366,42.281 87.781,40.866 87.781,38.779 86.958,37.956 85.711,37.956 85.54,37.786 X3.2@85.54,36.73
CNV_1_P: DD4.2 X3.3 | length 51.7
  Top Layer w0.146: DD4.2@52.25,21.65 52.683,21.65 52.952,21.919 52.952,21.978 53.123,22.149 53.519,22.149 54.5,23.129 54.5,25.902 60.856,32.258 69.656,32.258 79.406,42.008 86.253,42.008 87.508,40.753 87.508,38.892 86.845,38.229 85.251,38.229 84.27,39.21 X3.3@84.27,39.27
CNV_2_N: DD4.5 X4.2 | length 32.6
  Top Layer w0.146: DD4.5@52.25,25.46 51.817,25.46 51.548,25.729 51.548,25.788 51.377,25.959 51.022,25.959 49.719,27.262 49.719,30.116 54.134,34.531 69.041,34.531 70.34,35.831 70.34,37.261 69.863,37.738 69.622,37.738 69.451,37.567 69.451,36.831 X4.2@69.33,36.71
CNV_2_P: DD4.6 X4.3 | length 33.6
  Top Layer w0.146: DD4.6@52.25,26.73 51.817,26.73 51.548,26.461 51.548,26.402 51.377,26.231 51.135,26.231 49.992,27.375 49.992,30.003 54.247,34.258 69.154,34.258 70.613,35.718 70.613,37.374 69.673,38.314 68.936,38.314 68.06,39.19 X4.3@68.06,39.25
CNV_3_N: DD4.11 X5.2 | length 30.3
  Top Layer w0.146: DD4.11@46.85,26.73 46.417,26.73 46.148,26.999 46.148,27.058 45.977,27.229 45.622,27.229 44.074,28.777 44.074,38.924 46.9,41.75 52.636,41.75 54.404,39.982 54.404,38.372 54.073,38.041 53.251,38.041 53.08,37.87 X5.2@53.08,36.71
CNV_3_P: DD4.10 X5.3 | length 29
  Top Layer w0.146: DD4.10@46.85,28 46.417,28 46.148,27.731 46.148,27.672 45.977,27.501 45.735,27.501 44.347,28.89 44.347,38.811 47.013,41.477 52.523,41.477 54.131,39.869 54.131,38.485 53.96,38.314 52.686,38.314 51.81,39.19 X5.3@51.81,39.25
CNV_4_N: DD4.13 X6.2 | length 27.1
  Top Layer w0.162: v1@43.8,24.234 44.354,23.68 44.623,23.68 45.828,23.68 46.338,24.19 DD4.13@46.85,24.19
  Bottom Layer w0.162: X6.2@36.75,36.71 36.75,37.68 36.94,37.87 38.094,37.87 38.546,37.418 38.546,35.905 36.791,34.149 36.791,32.183 40.195,28.779 42.904,28.779 44.908,26.775 44.908,24.116 44.472,23.68 44.203,23.68 44.013,23.87 44.013,23.904 43.8,24.117 v1(43.8,24.236)
CNV_4_P: DD4.14 X6.3 | length 28.8
  Top Layer w0.162: v1(43.8,22.836) 44.354,23.391 44.743,23.391 45.867,23.391 46.338,22.92 DD4.14@46.85,22.92
  Bottom Layer w0.162: X6.3@35.48,39.25 35.48,39.178 36.499,38.16 38.214,38.16 38.836,37.538 38.836,35.785 37.08,34.029 37.08,32.303 40.314,29.069 43.024,29.069 45.198,26.895 45.198,23.996 44.592,23.391 44.203,23.391 44.013,23.201 44.013,23.167 43.8,22.954 v1(43.8,22.836)
CNV_5_N: DD5.13 X7.2 | length 63.1
  Top Layer w0.162: v1(58.3,24.2) 58.377,24.2 58.952,23.625 60.166,23.625 60.356,23.815 60.356,23.859 60.612,24.115 DD5.13@61.05,24.115
  Bottom Layer w0.162: X7.2@20.58,36.73 20.58,37.775 20.77,37.966 22.707,37.966 26.52,41.778 56.416,41.778 57.694,40.5 60,38.194 60,24.145 59.5,23.645 58.972,23.645 58.703,23.645 58.513,23.835 58.513,23.868 58.3,24.082 v1(58.3,24.2)
CNV_5_P: DD5.14 X7.3 | length 64.7
  Top Layer w0.162: v1(58.3,22.8) 58.418,22.8 58.954,23.335 60.166,23.335 60.356,23.145 60.356,23.101 60.612,22.845 DD5.14@61.05,22.845
  Bottom Layer w0.162: X7.3@19.31,39.27 19.31,39.198 20.253,38.255 22.588,38.255 26.4,42.067 56.536,42.067 57.8,40.804 60.289,38.314 60.289,24.025 59.62,23.355 59.092,23.355 58.703,23.355 58.513,23.165 58.513,23.132 58.3,22.918 v1(58.3,22.8)
CNV_DD_N: DD5.5 X2.5 | length 21.1
  Top Layer w0.146: DD5.5@66.45,25.385 66.017,25.385 65.748,25.654 65.748,25.713 65.577,25.884 65.335,25.884 64,24.548 64,17.487 69.251,12.236 69.251,10.278 69.422,10.107 70.178,10.107 X2.5@70.47,9.815
CNV_DD_P: DD5.6 X2.6 | length 23.8
  Top Layer w0.146: DD5.6@66.45,26.655 66.017,26.655 65.748,26.386 65.748,26.327 65.577,26.156 65.222,26.156 63.727,24.661 63.727,17.374 68.978,12.123 68.978,9.771 70.173,8.576 70.173,7.572 X2.6@70.47,7.275